# EAGLE board PCB (EAGLE 9.7.0)
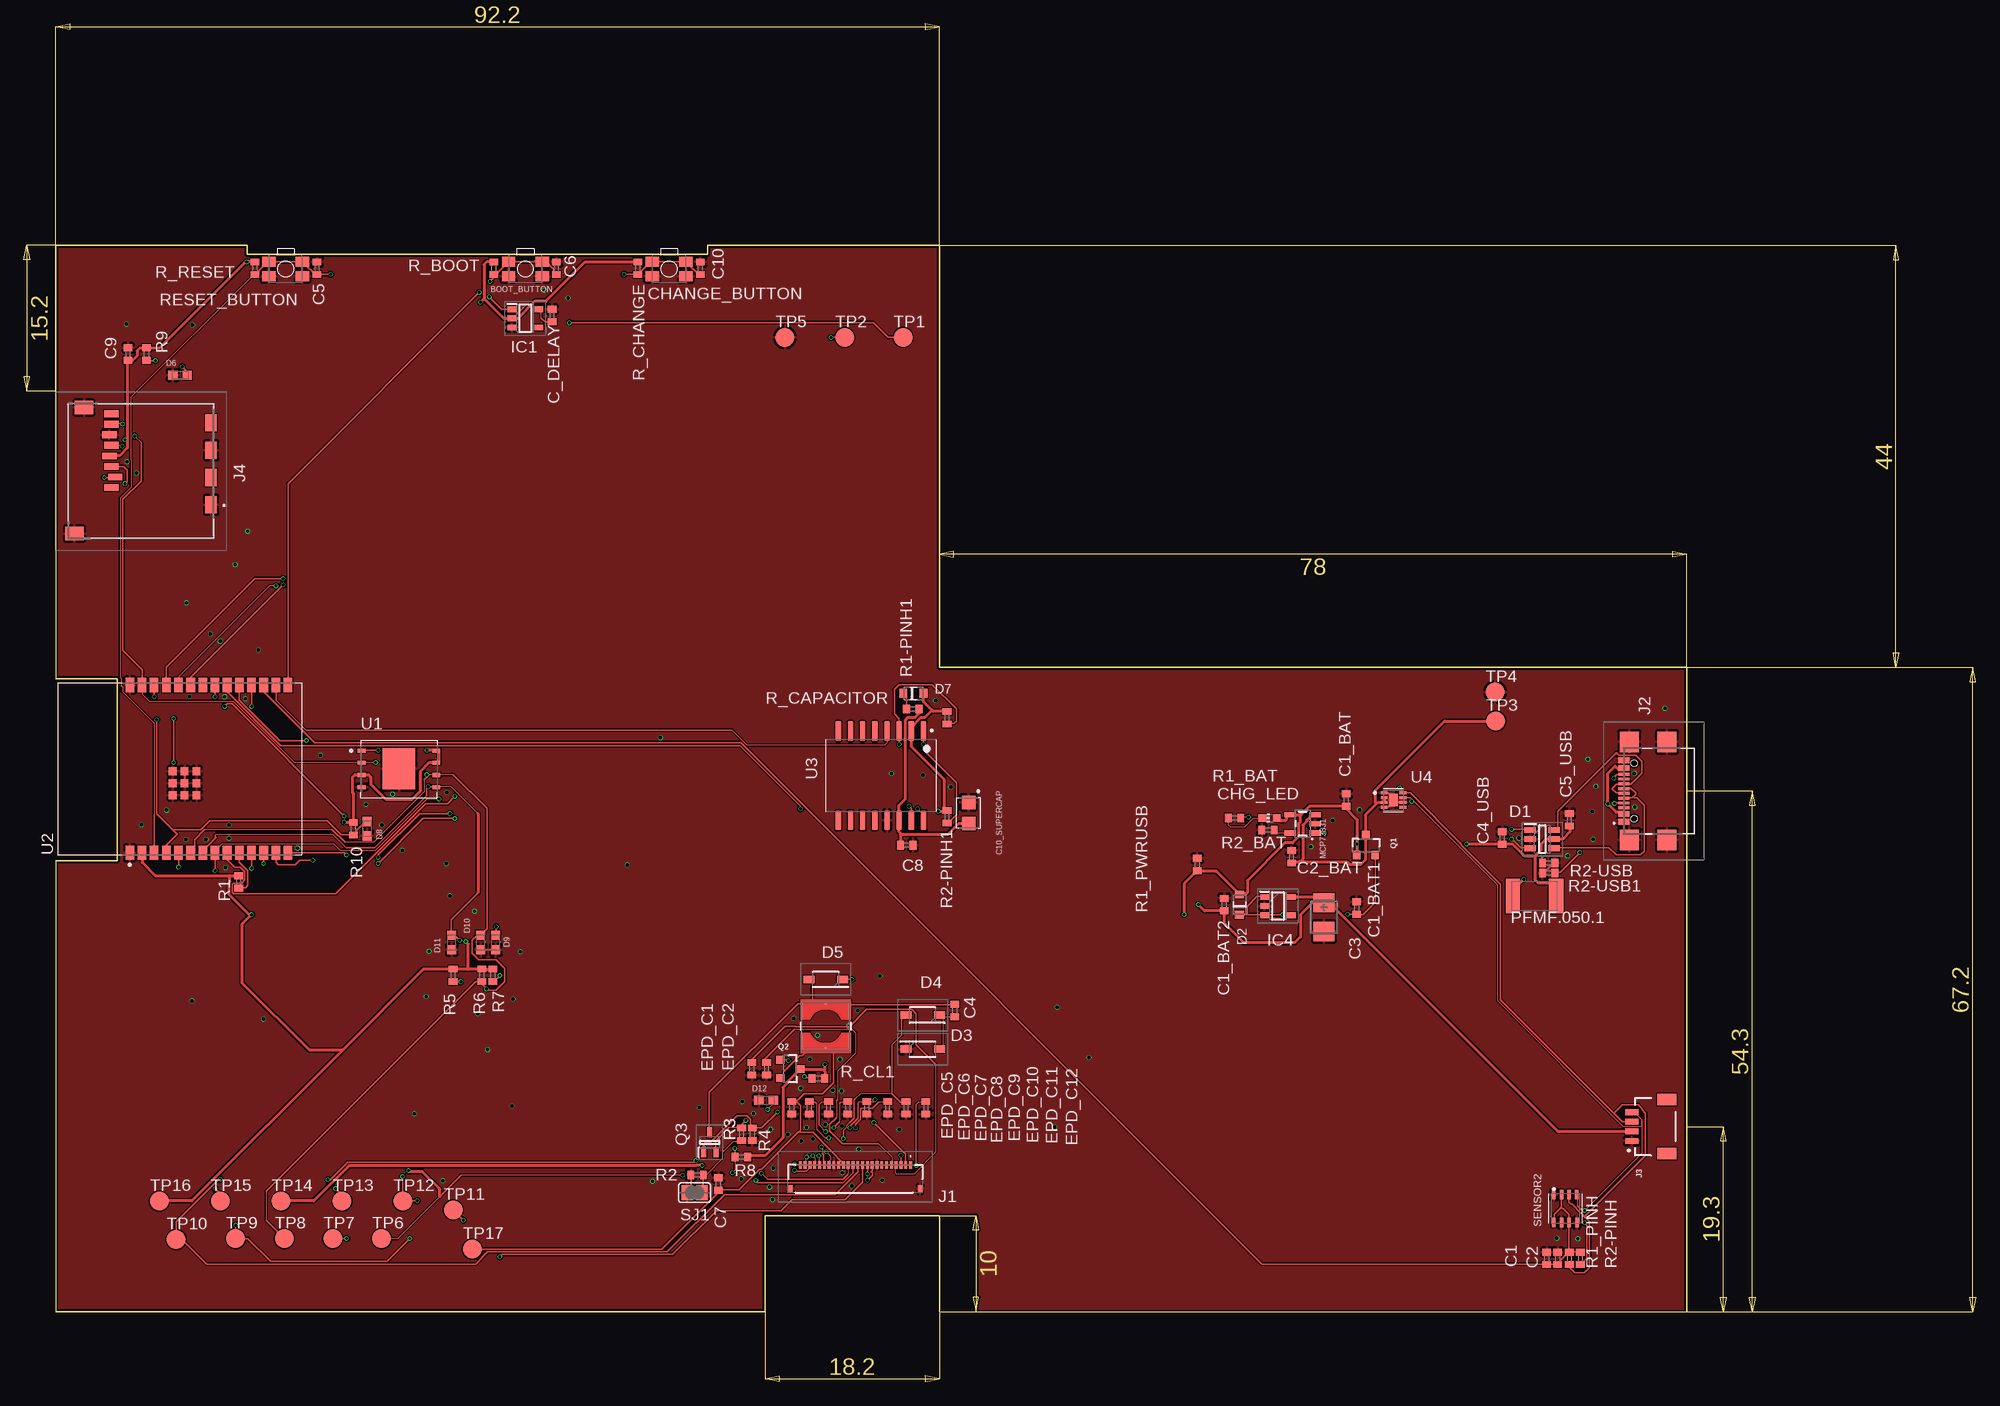
[diagram p0: board, top side]
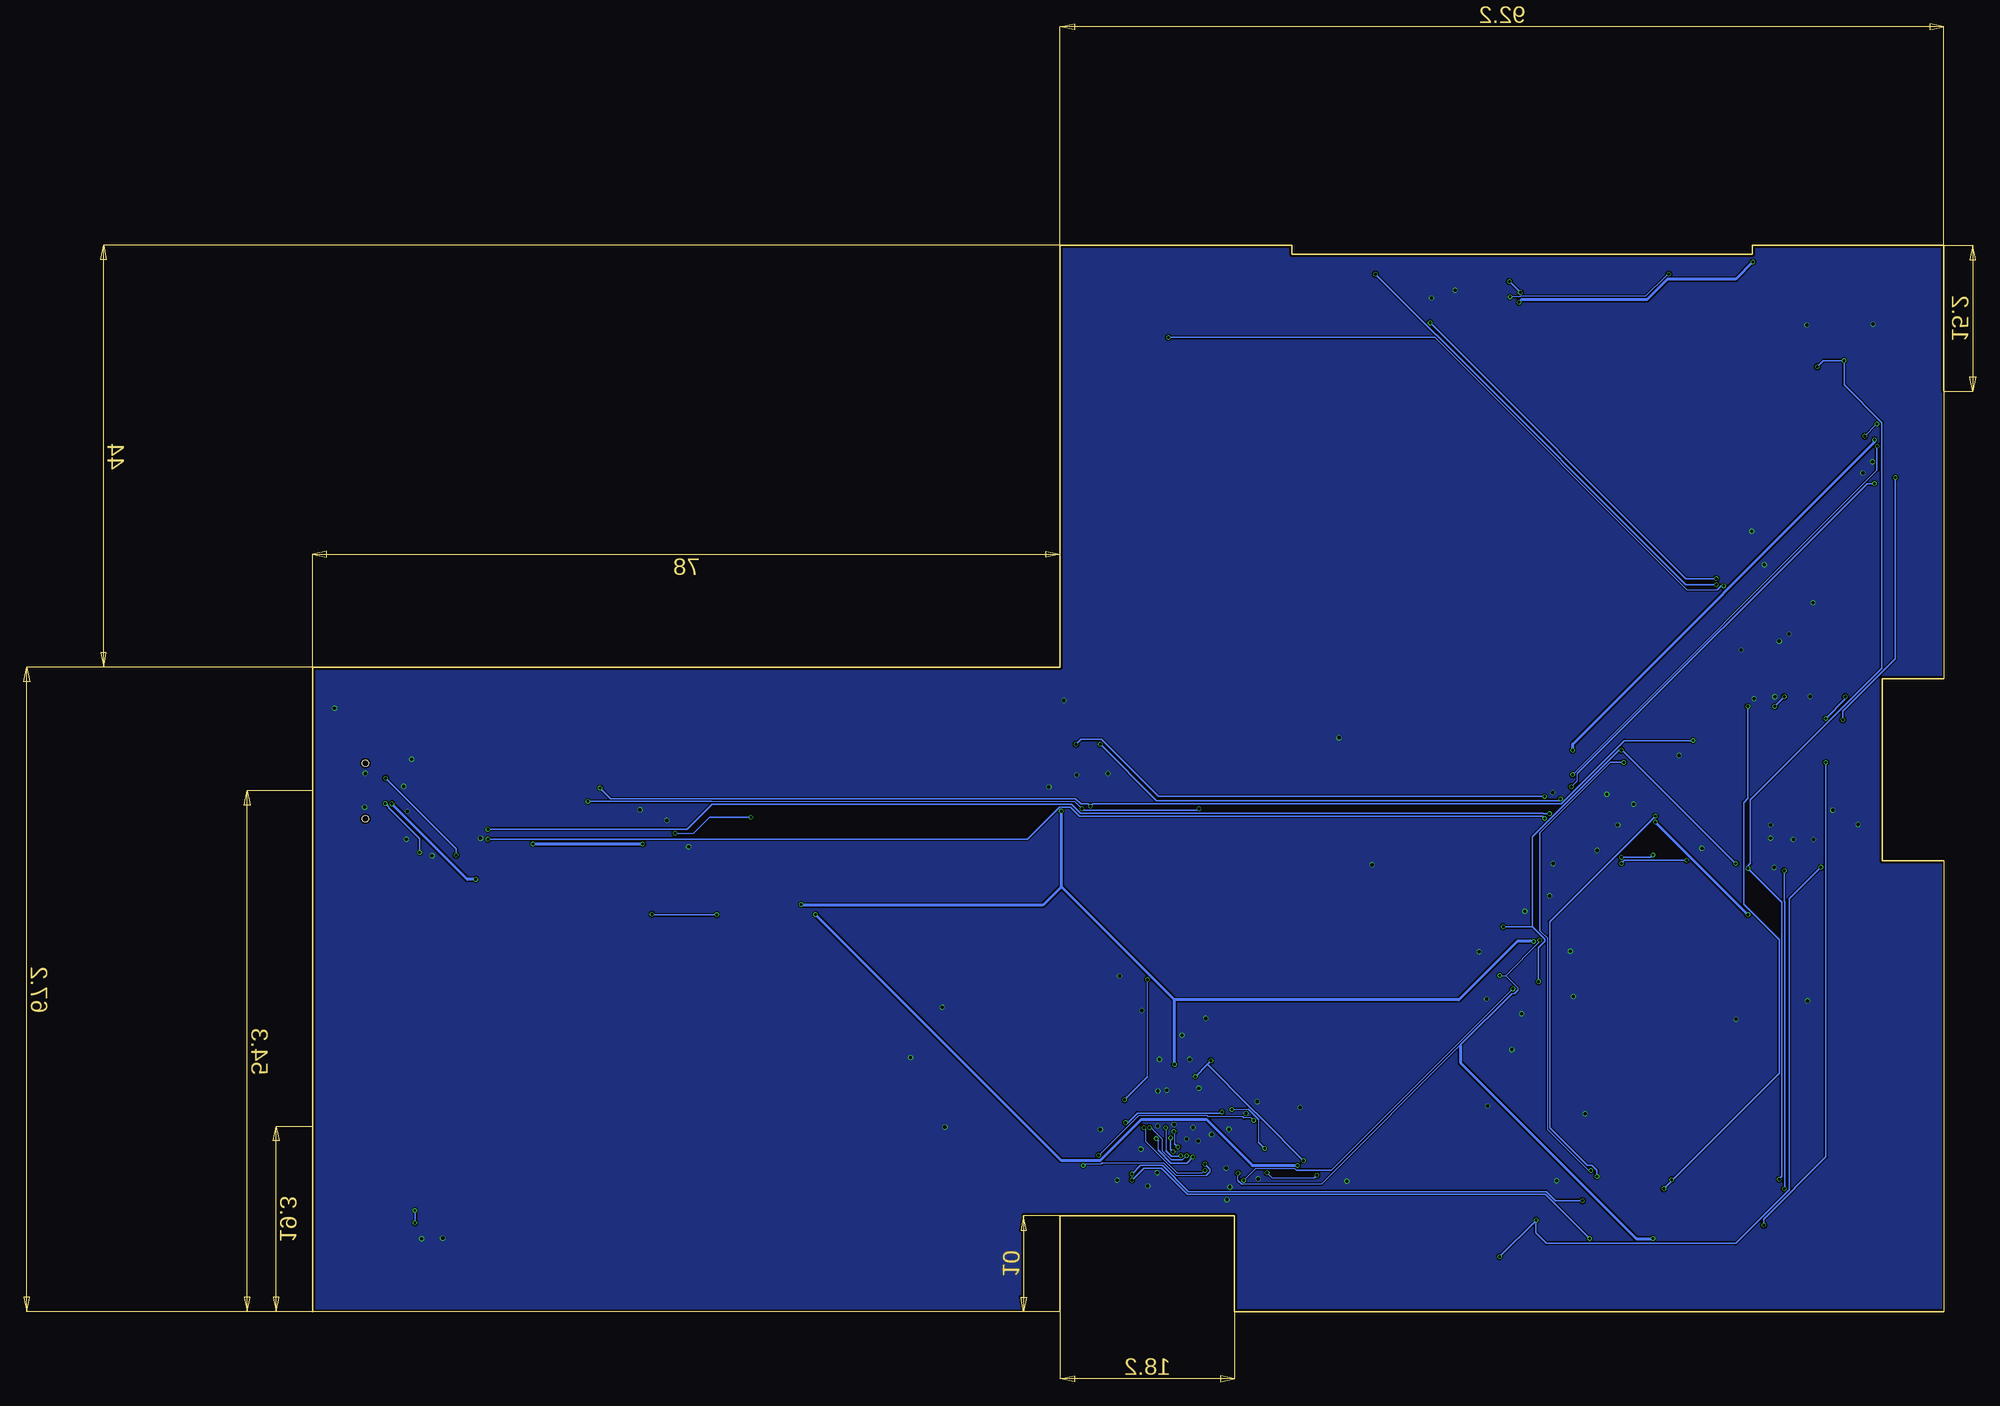
[diagram p1: board, bottom side, seen from below]

Size 170.2 x 111.2 mm. Coordinates in mm from the lower left corner, seen from the top.
Outline: 92.2,0 170.2,0 170.2,67.2 92.2,67.2 92.2,111.2 68,111.2 68,110.3 20,110.3 20,111.2 0,111.2 0,96 0,66 6.41,66 6.41,47 0,47 0,0 74,0 74,10 92.2,10 92.2,0
Copper layers (1*16): Top 0.035mm / dielectric 1.6mm / Bottom 0.035mm
Design rules "jlcpcb-2layers.dru": minimum track width 5mil, minimum drill 0.3mm, track to track 5mil, track to pad 5mil, pad to pad 5mil, via to via 5mil, smd to smd 5mil, copper to edge 0.2mm, drill to drill 6mil, minimum pad ring 10mil, minimum via ring 3mil, stop-mask expansion 4mil, vias tented up to drill 0mil, thermal gap 10mil

## Footprints (pad centres in the part's own frame; a part is rotated, then mirrored left to right if it is on the bottom)
MYBUTTON = smd 1.4 x 1.05: 1 1.75,0.75; 2 -1.75,0.75; 3 -1.75,-0.75; 4 1.75,-0.75
EAGLE-LTSPICE_C0402 = smd 0.7 x 0.9: 1 -0.65,0; 2 0.65,0
RCL_CT3528 = smd 2 x 2.2: + -1.5,0; - 1.5,0
CAPCP3225X100N = smd 1.4 x 1.4: 1 -1.1,0; 2 1.1,0
ADAFRUIT_CHIP-LED0603 = smd 0.8 x 0.8: A 0,-0.75; C 0,0.75
SOT95P280X145-6N = smd 1.2 x 0.6: 1 -1.25,0.95; 2 -1.25,0; 3 -1.25,-0.95; 4 1.25,-0.95; 5 1.25,0; 6 1.25,0.95
ESP32_WROVER_AVX---SD0805S020S1R0_AVX_SD0805S020S1R0_0 = smd 0.8 x 0.9: 1 -1.05,0; 2 1.05,0
SOD3716X135N = smd 1.15 x 0.8: 1 -1.75,0; 2 1.75,0
DIOC1608X36N = smd 0.97 x 0.94: 1 -0.75,0; 2 0.75,0
SOT95P280X125-5N = smd 0.9 x 0.6: 1 -1.4,0.95; 2 -1.4,0; 3 -1.4,-0.95; 4 1.4,-0.95; 5 1.4,0.95
SOT95P280X120-5N = smd 0.9 x 0.6: 1 -1.4,0.95; 2 -1.4,0; 3 -1.4,-0.95; 4 1.4,-0.95; 5 1.4,0.95
FH34SRJ24S05SH99 = smd 0.3 x 0.8: 1 5.75,1.45; 2 5.25,1.45; 3 4.75,1.45; 4 4.25,1.45; 5 3.75,1.45; 6 3.25,1.45; 7 2.75,1.45; 8 2.25,1.45; 9 1.75,1.45; 10 1.25,1.45; 11 0.75,1.45; 12 0.25,1.45; 13 -0.25,1.45; 14 -0.75,1.45; 15 -1.25,1.45; 16 -1.75,1.45; 17 -2.25,1.45; 18 -2.75,1.45; 19 -3.25,1.45; 20 -3.75,1.45; 21 -4.25,1.45; 22 -4.75,1.45; 23 -5.25,1.45; 24 -5.75,1.45 | smd 0.4 x 0.8: MP1 6.75,-1.05; MP2 -6.75,-1.05
SAMACSYS_PARTS_USB4110GFA = smd 0.3 x 1.15: A1 -3.35,3.678; A4 -2.55,3.678; A5 -1.25,3.678; A6 -0.25,3.678; A7 0.25,3.678; A8 1.25,3.678; A9 2.55,3.678; A12 3.35,3.678; B1 3.05,3.678; B4 2.25,3.678; B5 1.75,3.678; B6 0.75,3.678; B7 -0.75,3.678; B8 -1.75,3.678; B9 -2.25,3.678; B12 -3.05,3.678 | smd 2.18 x 2: MP1 -5.11,-0.827; MP2 5.11,-0.827; MP3 -5.11,3.103; MP4 5.11,3.103 | hole 0.65: -2.89,2.603; 2.89,2.603
JST04_1MM_RA = smd 0.6 x 1.35: 1 -1.5,0; 2 -0.5,0; 3 0.5,0; 4 1.5,0 | smd 1.2 x 2: NC1 2.8,-3.675; NC2 -2.8,-3.675
112ATAARR03ATTEND = smd 1.8 x 1.2: G1 10.6,10.4; G2 4.9,10.4; S1 7.75,10.4; S2 2.05,10.4 | smd 1.4 x 1.9: G3 13.6,-3.85; G4 0.45,-2.85 | smd 0.7 x 1.5: P1 8.8,0; P2 7.7,0.4; P3 6.6,0; P4 5.5,-0.2; P5 4.4,0; P6 3.3,-0.2; P7 2.2,0; P8 1.1,0
IND_4828-WE-TPC_WRE = smd 0.127 x 0.127: 1 -2.286,0; 2 2.286,0
ESP32_WROVER_SPARKFUN-IC-POWER_SOT23-5 = smd 0.55 x 1.2: 1 -0.95,-1.3; 2 0,-1.3; 3 0.95,-1.3; 4 0.95,1.3; 5 -0.95,1.3
ESP32C6_VARISTOR_CT/CN1812 = smd 1.5 x 3.6: 1 -2.25,0; 2 2.25,0
ESP32_WROVER_SPARKFUN-DISCRETESEMI_SOT23-3 = smd 0.8 x 0.9: 1 -0.95,-1; 2 0.95,-1; 3 0,1.1
SOT65P210X110-3N = smd 1.05 x 0.5: 1 -1.05,0.65; 2 -1.05,-0.65; 3 1.05,0
ESP32_WROVER_EAGLE-LTSPICE_R0402 = smd 0.7 x 0.9: 1 -0.65,0; 2 0.65,0
ESP32_WROVER_BME680_PSON80P300X300X100-8N = smd 1.016 x 0.5: 1 1.458,1.2; 2 1.458,0.4; 3 1.458,-0.4; 4 1.458,-1.2; 5 -1.458,-1.22; 6 -1.458,-0.4; 7 -1.458,0.4; 8 -1.458,1.2
SJ = smd 1.168 x 1.6: 1 -0.762,0; 2 0.762,0
TP20R = smd 2 x 2: TP 0,0
SON127P600X800X80-9N = smd 0.94 x 0.44: 1 -3.895,1.905; 2 -3.895,0.635; 3 -3.895,-0.635; 4 -3.895,-1.905; 5 3.895,-1.905; 6 3.895,-0.635; 7 3.895,0.635; 8 3.895,1.905 | smd 3.4 x 4.3: 9 0,0
XCVR_ESP32-C6-WROOM-1-N8 = smd 1.5 x 0.9: 1 -8.75,5.26; 2 -8.75,3.99; 3 -8.75,2.72; 4 -8.75,1.45; 5 -8.75,0.18; 6 -8.75,-1.09; 7 -8.75,-2.36; 8 -8.75,-3.63; 9 -8.75,-4.9; 10 -8.75,-6.17; 11 -8.75,-7.44; 12 -8.75,-8.71; 13 -8.75,-9.98; 14 -8.75,-11.25; 15 8.75,-11.25; 16 8.75,-9.98; 17 8.75,-8.71; 18 8.75,-7.44; 19 8.75,-6.17; 20 8.75,-4.9; 21 8.75,-3.63; 22 8.75,-2.36; 23 8.75,-1.09; 24 8.75,0.18; 25 8.75,1.45; 26 8.75,2.72; 27 8.75,3.99; 28 8.75,5.26 | smd 0.8 x 0.8: 29_1 -2.755,0.79; 29_2 -1.505,0.79; 29_3 -0.255,0.79; 29_4 -2.755,-0.46; 29_5 -1.505,-0.46; 29_6 -0.255,-0.46; 29_7 -2.755,-1.71; 29_8 -1.505,-1.71; 29_9 -0.255,-1.71
SOIC127P1032X265-16N = smd 2.05 x 0.59: 1 -4.655,4.445; 2 -4.655,3.175; 3 -4.655,1.905; 4 -4.655,0.635; 5 -4.655,-0.635; 6 -4.655,-1.905; 7 -4.655,-3.175; 8 -4.655,-4.445; 9 4.655,-4.445; 10 4.655,-3.175; 11 4.655,-1.905; 12 4.655,-0.635; 13 4.655,0.635; 14 4.655,1.905; 15 4.655,3.175; 16 4.655,4.445
SON50P200X200X80-9N = smd 0.76 x 0.27: 1 -0.985,0.75; 2 -0.985,0.25; 3 -0.985,-0.25; 4 -0.985,-0.75; 5 0.985,-0.75; 6 0.985,-0.25; 7 0.985,0.25; 8 0.985,0.75 | smd 0.9 x 1.3: 9 0,0

## Placement (x,y rotation side)
BOOT_BUTTON  BUTTON_CUSYOMV1  [MYBUTTON]  49.02,108.75 180 top
C1  100nF  [EAGLE-LTSPICE_C0402]  155.56,5.55 90 top
C1_BAT  4.7uF  [EAGLE-LTSPICE_C0402]  134.64,53.36 90 top
C1_BAT1  4.7uF  [EAGLE-LTSPICE_C0402]  135.72,42.1 90 top
C1_BAT2  4.7uf  [EAGLE-LTSPICE_C0402]  121.92,42.45 90 top
C2  100nF  [EAGLE-LTSPICE_C0402]  156.71,5.55 90 top
C2_BAT  4.7uF  [EAGLE-LTSPICE_C0402]  128.94,47.45 90 top
C3  100uF TANT  [RCL_CT3528]  132.34,41.15 270 top
C4  4.7uF/25V  [EAGLE-LTSPICE_C0402]  93.81,31.41 90 top
C4_USB  100nF  [EAGLE-LTSPICE_C0402]  150.92,49.4 90 top
C5  1uF  [EAGLE-LTSPICE_C0402]  27.28,108.83 90 top
C5_USB  4.7uF  [EAGLE-LTSPICE_C0402]  157.92,51.31 90 top
C6  100nF  [EAGLE-LTSPICE_C0402]  52.26,108.83 90 top
C7  10uF  [EAGLE-LTSPICE_C0402]  69.14,13.3 90 top
C8  100nF  [EAGLE-LTSPICE_C0402]  88.8,48.64 0 top
C9  100nF  [EAGLE-LTSPICE_C0402]  7.56,99.87 90 top
C10  100nF  [EAGLE-LTSPICE_C0402]  67.26,108.83 90 top
C10_SUPERCAP  CPH3225A  [CAPCP3225X100N]  95.25,52.01 270 top
C_DELAY  100nF  [EAGLE-LTSPICE_C0402]  51.8,103.9 90 top
CHANGE_BUTTON  BUTTON_CUSYOMV1  [MYBUTTON]  64,108.75 180 top
CHG_LED  [ADAFRUIT_CHIP-LED0603]  126.65,51.48 90 top
D1  USBLC6-2SC6Y  [SOT95P280X145-6N]  155.1,49.28 0 top
D2  SD0805S020S1R0  [ESP32_WROVER_AVX---SD0805S020S1R0_AVX_SD0805S020S1R0_0]  123.51,42.45 90 top
D3  MBR0530  [SOD3716X135N]  90.45,27.38 0 top
D4  MBR0530  [SOD3716X135N]  90.45,30.92 180 top
D5  MBR0530  [SOD3716X135N]  80.35,34.64 180 top
D6  PGB1010603MR  [DIOC1608X36N]  12.98,97.68 0 top
D7  ESP32_WROVER_AVX---SD0805S020S1R0_AVX_SD0805S020S1R0_0_0AVX_SD0805S020S1R0_0_0  [ESP32_WROVER_AVX---SD0805S020S1R0_AVX_SD0805S020S1R0_0]  89.5,64.49 0 top
D8  PGB1010603MR  [DIOC1608X36N]  32.52,50.36 90 top
D9  PGB1010603MR  [DIOC1608X36N]  45.92,38.5 90 top
D10  PGB1010603MR  [DIOC1608X36N]  44.32,38.5 90 top
D11  PGB1010603MR  [DIOC1608X36N]  41.32,38.5 90 top
D12  PGB1010603MR  [DIOC1608X36N]  74.12,22.02 0 top
EPD_C1  1uF/50V  [EAGLE-LTSPICE_C0402]  72.64,25.32 90 top
EPD_C2  1uF/50V  [EAGLE-LTSPICE_C0402]  74.18,25.32 90 top
EPD_C5  0.1uF/50V  [EAGLE-LTSPICE_C0402]  76.8,21.25 90 top
EPD_C6  1uF/50V  [EAGLE-LTSPICE_C0402]  78.64,21.25 90 top
EPD_C7  1uF/50V  [EAGLE-LTSPICE_C0402]  80.64,21.25 90 top
EPD_C8  1uF/50V  [EAGLE-LTSPICE_C0402]  82.64,21.25 90 top
EPD_C9  1uF/50V  [EAGLE-LTSPICE_C0402]  84.64,21.25 90 top
EPD_C10  1uF/50V  [EAGLE-LTSPICE_C0402]  86.8,21.25 90 top
EPD_C11  1uF/50V  [EAGLE-LTSPICE_C0402]  88.72,21.25 90 top
EPD_C12  1uF/50V  [EAGLE-LTSPICE_C0402]  90.8,21.25 90 top
IC1  BD5229G-TR  [SOT95P280X125-5N]  49,103.6 0 top
IC4  XC6220A331MR-G  [SOT95P280X120-5N]  127.53,42.3 0 top
J1  FH34SRJ-24S-0.5SH_99_  [FH34SRJ24S05SH99]  83.44,13.85 0 top
J2  SAMACSYS_PARTS_USB4110-GF-A  [SAMACSYS_PARTS_USB4110GFA]  167.28,54.3 90 top
J3  QWIIC_RIGHT_ANGLE  [JST04_1MM_RA]  164.43,19.3 90 top
J4  112A-TAAR-R03_ATTEND  [112ATAARR03ATTEND]  5.82,94.75 270 top
L1  744043680IND_4828-WE-TPC_WRE  [IND_4828-WE-TPC_WRE]  80.35,29.77 270 top
MCP73831  ESP32_WROVER_SPARKFUN-IC-POWER_MCP73831  [ESP32_WROVER_SPARKFUN-IC-POWER_SOT23-5]  130.1,50.88 90 top
PFMF.050.1  ESP32C6_VARISTORCN1812  [ESP32C6_VARISTOR_CT/CN1812]  154.28,43.34 0 top
Q1  20V/4.2A/52mΩ/1.4W  [ESP32_WROVER_SPARKFUN-DISCRETESEMI_SOT23-3]  136.7,48.61 0 top
Q2  20V/4.2A/52mΩ/1.4W  [ESP32_WROVER_SPARKFUN-DISCRETESEMI_SOT23-3]  76.61,25.32 270 top
Q3  SI1308EDL-T1-GE3  [SOT65P210X110-3N]  68.24,17.65 90 top
R1  [ESP32_WROVER_EAGLE-LTSPICE_R0402]  19.1,44.8 90 top
R1-PINH1  10K  [ESP32_WROVER_EAGLE-LTSPICE_R0402]  93,61.93 90 top
R1_BAT  200  [ESP32_WROVER_EAGLE-LTSPICE_R0402]  123,51.48 0 top
R1_PINH  10K  [ESP32_WROVER_EAGLE-LTSPICE_R0402]  157.92,5.55 90 top
R1_PWRUSB  100K  [ESP32_WROVER_EAGLE-LTSPICE_R0402]  119.09,46.63 270 top
R2  2.2  [ESP32_WROVER_EAGLE-LTSPICE_R0402]  66.93,14.26 0 top
R2-PINH  10K  [ESP32_WROVER_EAGLE-LTSPICE_R0402]  159.07,5.55 90 top
R2-PINH1  10K  [ESP32_WROVER_EAGLE-LTSPICE_R0402]  93,51.6 90 top
R2-USB  5k1  [ESP32_WROVER_EAGLE-LTSPICE_R0402]  155.77,46.79 0 top
R2-USB1  5k1  [ESP32_WROVER_EAGLE-LTSPICE_R0402]  155.77,45.74 0 top
R2_BAT  2K  [ESP32_WROVER_EAGLE-LTSPICE_R0402]  126.48,50.24 0 top
R3  0.47  [ESP32_WROVER_EAGLE-LTSPICE_R0402]  71.56,18.49 90 top
R4  10K  [ESP32_WROVER_EAGLE-LTSPICE_R0402]  72.68,18.49 90 top
R5  10K  [ESP32_WROVER_EAGLE-LTSPICE_R0402]  41.48,35.09 90 top
R6  10K  [ESP32_WROVER_EAGLE-LTSPICE_R0402]  44.48,35.09 90 top
R7  10K  [ESP32_WROVER_EAGLE-LTSPICE_R0402]  45.63,35.09 90 top
R8  10K  [ESP32_WROVER_EAGLE-LTSPICE_R0402]  71.54,16.14 0 top
R9  10K  [ESP32_WROVER_EAGLE-LTSPICE_R0402]  9.48,99.87 90 top
R10  10K  [ESP32_WROVER_EAGLE-LTSPICE_R0402]  31.08,50.36 90 top
R_BOOT  10K  [ESP32_WROVER_EAGLE-LTSPICE_R0402]  45.72,108.83 90 top
R_CAPACITOR  15  [ESP32_WROVER_EAGLE-LTSPICE_R0402]  89.42,62.85 0 top
R_CHANGE  10K  [ESP32_WROVER_EAGLE-LTSPICE_R0402]  60.75,108.83 90 top
R_CL1  10K  [ESP32_WROVER_EAGLE-LTSPICE_R0402]  79.57,24.32 0 top
R_RESET  10K  [ESP32_WROVER_EAGLE-LTSPICE_R0402]  20.8,108.83 90 top
RESET_BUTTON  BUTTON_CUSYOMV1  [MYBUTTON]  24,108.75 180 top
SENSOR2  ESP32_WROVER_BME680_BME680  [ESP32_WROVER_BME680_PSON80P300X300X100-8N]  157.5,10.74 90 top
SJ1  [SJ]  66.66,12.4 0 top
TP1  TPTP20R  [TP20R]  88.41,101.6 0 top
TP2  TPTP20R  [TP20R]  82.33,101.6 0 top
TP3  TPTP20R  [TP20R]  150.25,61.6 0 top
TP4  TPTP20R  [TP20R]  150.17,64.6 0 top
TP5  TPTP20R  [TP20R]  76.09,101.6 0 top
TP6  TPTP20R  [TP20R]  34.01,7.6 0 top
TP7  TPTP20R  [TP20R]  28.93,7.6 0 top
TP8  TPTP20R  [TP20R]  23.85,7.6 0 top
TP9  TPTP20R  [TP20R]  18.77,7.6 0 top
TP10  TPTP20R  [TP20R]  12.58,7.52 0 top
TP11  TPTP20R  [TP20R]  41.49,10.6 0 top
TP12  TPTP20R  [TP20R]  36.23,11.52 0 top
TP13  TPTP20R  [TP20R]  29.88,11.52 0 top
TP14  TPTP20R  [TP20R]  23.53,11.52 0 top
TP15  TPTP20R  [TP20R]  17.18,11.52 0 top
TP16  TPTP20R  [TP20R]  10.83,11.52 0 top
TP17  TPTP20R  [TP20R]  43.48,6.52 0 top
U1  W25Q512JVEIQ  [SON127P600X800X80-9N]  35.83,56.61 0 top
U2  ESP32-C6-WROOM-1-N8  [XCVR_ESP32-C6-WROOM-1-N8]  13,56.61 90 top
U3  DS3231SN#  [SOIC127P1032X265-16N]  86.1,55.91 270 top
U4  MAX17048G+T10  [SON50P200X200X80-9N]  139.57,53.36 0 top

## Library data of the parts
BOOT_BUTTON CHANGE_BUTTON CHG_LED PFMF.050.1 RESET_BUTTON SJ1 TP1-TP17 = DeskAssistant v19 v1
C1 C1_BAT C1_BAT1 C1_BAT2 C2 C2_BAT C4 C4_USB C5 C5_USB C6-C10 C_DELAY EPD_C1 EPD_C2 EPD_C5-EPD_C12 = DeskAssistant v19 v1; SPICEMODEL: NONE; SPICEPREFIX: C
C3 = DeskAssistant v19 v1; SPICEPREFIX: C
C10_SUPERCAP = DeskAssistant v19 v1; AVAILABILITY: Not in stock; CHECK_PRICES: https://www.snapeda.com/parts/CPH3225A/Seiko+Instruments/view-part/?ref=eda; DESCRIPTION: 11 mF (EDLC) Supercapacitor 3.3 V 1210 (3225 Metric) - -; MF: Seiko Instruments; MP: CPH3225A; PACKAGE: 1210 Seiko; PRICE: None; PURCHASE-URL: https://www.snapeda.com/api/url_track_click_mouser/?unipart_id=562593&manufacturer=Seiko Instruments&part_name=CPH3225A&search_term=None; SNAPEDA_LINK: https://www.snapeda.com/parts/CPH3225A/Seiko+Instruments/view-part/?ref=snap
D1 = DeskAssistant v19 v1; AVAILABILITY: In Stock; CHECK_PRICES: https://www.snapeda.com/parts/USBLC6-2SC6Y/STMicroelectronics/view-part/?ref=eda; DESCRIPTION: 17V Clamp 5A (8/20µs) Ipp Tvs Diode Surface Mount SOT-23-6; MF: STMicroelectronics; MP: USBLC6-2SC6Y; PACKAGE: SOT-23-6 STMicroelectronics; PRICE: None; SNAPEDA_LINK: https://www.snapeda.com/parts/USBLC6-2SC6Y/STMicroelectronics/view-part/?ref=snap
D2 = DeskAssistant v19 v1; CENTROID_NOT_SPECIFIED: No; DATASHEET: http://datasheets.avx.com/schottky.pdf; DIGIKEY_DESCRIPTION: DIODE SCHOTTKY 20V 1A 0805; DIGIKEY_PART_NUMBER: 478-7800-1-ND; LEAD_FREE: yes; MF: AVX; MOUSER_PART_NUMBER: 581-SD0805S020S1R0; PACKAGE: 0805 (2012 metric); PREFIX: D; ROHS: yes; SD0805S020S1R0: SD0805S020S1R0; TEMPERATURE_RANGE_HIGH: +125°C; TEMPERATURE_RANGE_LOW: -55°C
D3-D5 = DeskAssistant v19 v1; AVAILABILITY: In Stock; CHECK_PRICES: https://www.snapeda.com/parts/MBR0530/Onsemi/view-part/?ref=eda; DESCRIPTION: Diode Schottky 30 V 500mA Surface Mount SOD-123; MF: ON Semiconductor; MP: MBR0530; PACKAGE: SOD-123-2 ON Semiconductor; PRICE: None; PURCHASE-URL: https://www.snapeda.com/api/url_track_click_mouser/?unipart_id=179458&manufacturer=ON Semiconductor&part_name=MBR0530&search_term=None; SNAPEDA_LINK: https://www.snapeda.com/parts/MBR0530/Onsemi/view-part/?ref=snap
D6 D8-D12 = DeskAssistant v19 v1; AVAILABILITY: In Stock; CHECK_PRICES: https://www.snapeda.com/parts/PGB1010603MR/Littelfuse/view-part/?ref=eda; DESCRIPTION: 150V (Typ) Clamp - Ipp Tvs Diode Surface Mount 0603 (1608 Metric); MF: Littelfuse Inc.; MP: PGB1010603MR; PACKAGE: 0603 Littelfuse Inc.; PRICE: None; PURCHASE-URL: https://www.snapeda.com/api/url_track_click_mouser/?unipart_id=5659453&manufacturer=Littelfuse Inc.&part_name=PGB1010603MR&search_term=None; SNAPEDA_LINK: https://www.snapeda.com/parts/PGB1010603MR/Littelfuse/view-part/?ref=snap
D7 = DeskAssistant v19 v1; CENTROID_NOT_SPECIFIED: No; DATASHEET: http://datasheets.avx.com/schottky.pdf; DIGIKEY_DESCRIPTION: DIODE SCHOTTKY 20V 1A 0805; DIGIKEY_PART_NUMBER: 478-7800-1-ND; LEAD_FREE: yes; MF: AVX; MOUSER_PART_NUMBER: 581-SD0805S020S1R0; PACKAGE: 0805 (2012 metric); PREFIX: D; ROHS: yes; TEMPERATURE_RANGE_HIGH: +125°C; TEMPERATURE_RANGE_LOW: -55°C
IC1 = DeskAssistant v19 v1; DESCRIPTION: Voltage Detector with Adjustable Delay Time: CMOS processes are utilized to develop high precision, low current consumption CMOS reset ICs that allow arbitrary setting of the delay time. The extensive lineup includes both Nch Open Drain and CMOS output types in a wide range of detection voltages (from 2.3V to 6.0V, in 0.1V steps), enabling selection of the ideal solution based on customer requirements. In addition, the entire series is of course both lead-free and RoHS-compliant.; HEIGHT: 1.25mm; MANUFACTURER_NAME: ROHM Semiconductor; MANUFACTURER_PART_NUMBER: BD5229G-TR; MOUSER_PART_NUMBER: 755-BD5229G-TR; MOUSER_PRICE-STOCK: https://www.mouser.co.uk/ProductDetail/ROHM-Semiconductor/BD5229G-TR?qs=4kLU8WoGk0vvnhrrYwdszw%3D%3D
IC4 = DeskAssistant v19 v1; DESCRIPTION: LDO Voltage Regulators; HEIGHT: 1.2mm; MANUFACTURER_NAME: Torex; MANUFACTURER_PART_NUMBER: XC6220A331MR-G; MOUSER_PART_NUMBER: 865-XC6220A331MR-G; MOUSER_PRICE-STOCK: https://www.mouser.co.uk/ProductDetail/Torex-Semiconductor/XC6220A331MR-G?qs=AsjdqWjXhJ8ZSWznL1J0gg%3D%3D
J1 = DeskAssistant v19 v1; DESCRIPTION: 24 Position FFC, FPC Connector Contacts, Top and Bottom 0.020" (0.50mm) Surface Mount, Right Angle; HEIGHT: 1.1mm; MANUFACTURER_NAME: Hirose; MANUFACTURER_PART_NUMBER: FH34SRJ-24S-0.5SH(99); MOUSER_PART_NUMBER: 798-FH34SRJ24S05SH99; MOUSER_PRICE-STOCK: https://www.mouser.co.uk/ProductDetail/Hirose-Connector/FH34SRJ-24S-0.5SH99?qs=vcbW%252B4%252BSTIpKBl5ap9J8Fw%3D%3D
J2 = DeskAssistant v19 v1; DESCRIPTION: CONN USB 2.0 TYPE-C R/A SMT; HEIGHT: 3.26mm; MANUFACTURER_NAME: GCT (GLOBAL CONNECTOR TECHNOLOGY); MANUFACTURER_PART_NUMBER: USB4110-GF-A; MOUSER_PART_NUMBER: 640-USB4110-GF-A; MOUSER_PRICE-STOCK: https://www.mouser.co.uk/ProductDetail/GCT/USB4110-GF-A?qs=KUoIvG%2F9IlYiZvIXQjyJeA%3D%3D
J3 = DeskAssistant v19 v1; PROD_ID: CONN-13694
J4 = DeskAssistant v19 v1; DESCRIPTION: Micro SD Card Socket, Push-Push Type, Top Mount, SMT, H=1.83mm, 10u; HEIGHT: 1.9mm; MANUFACTURER_NAME: ATTEND; MANUFACTURER_PART_NUMBER: 112A-TAAR-R03 ATTEND
L1 = DeskAssistant v19 v1; 68UH: 68UH; COPYRIGHT: Copyright (C) 2024 Ultra Librarian. All rights reserved.; MANUFACTURER_PART_NUMBER: 744043680; MFR_NAME: Wurth Electronics
MCP73831 = DeskAssistant v19 v1; PROD_ID: IC-09995
Q1 Q2 = DeskAssistant v19 v1; DMG2305UX-7: DMG2305UX-7; PROD_ID: TRAN-14388
Q3 = DeskAssistant v19 v1; AVAILABILITY: In Stock; CHECK_PRICES: https://www.snapeda.com/parts/SI1308EDL-T1-GE3/Vishay+Siliconix/view-part/?ref=eda; DESCRIPTION: Si1308EDL-T1-GE3 N-channel MOSFET Transistor, 1.5 A, 30 V, 3-Pin SC-70 | Siliconix / Vishay SI1308EDL-T1-GE3; MF: Vishay Siliconix; MP: SI1308EDL-T1-GE3; PACKAGE: SOT-323 Vishay Semiconductor; PRICE: None; PURCHASE-URL: https://www.snapeda.com/api/url_track_click_mouser/?unipart_id=274603&manufacturer=Vishay Siliconix&part_name=SI1308EDL-T1-GE3&search_term=None; SNAPEDA_LINK: https://www.snapeda.com/parts/SI1308EDL-T1-GE3/Vishay+Siliconix/view-part/?ref=snap
R1 R1-PINH1 R1_BAT R1_PINH R2 R2-PINH R2-PINH1 R2-USB R2-USB1 R2_BAT R3-R10 R_BOOT R_CAPACITOR R_CHANGE R_CL1 R_RESET = DeskAssistant v19 v1; SPICEMODEL: NONE; SPICEPREFIX: R
R1_PWRUSB = DeskAssistant v19 v1; PWRUSB: PWRUSB; SPICEMODEL: NONE; SPICEPREFIX: R
SENSOR2 = DeskAssistant v19 v1; AVAILABILITY: Unavailable; BME688: BME688; DESCRIPTION: Integrated Environmental Unit; MF: Bosch Sensortec; MP: BME680; PACKAGE: LGA-8 Bosch Tools; PRICE: None
U1 = DeskAssistant v19 v1; AVAILABILITY: In Stock; CHECK_PRICES: https://www.snapeda.com/parts/W25Q512JVEIQ/Winbond+Electronics/view-part/?ref=eda; DESCRIPTION: FLASH - NOR Memory IC 512Mb (64M x 8) SPI - Quad I/O 133 MHz 8-WSON (8x6); MF: Winbond Electronics; MP: W25Q512JVEIQ; PACKAGE: Package; PRICE: None; SNAPEDA_LINK: https://www.snapeda.com/parts/W25Q512JVEIQ/Winbond+Electronics/view-part/?ref=snap
U2 = DeskAssistant v19 v1; AVAILABILITY: In Stock; CHECK_PRICES: https://www.snapeda.com/parts/ESP32-C6-WROOM-1-N8/Espressif+Systems/view-part/?ref=eda; DESCRIPTION: Multiprotocol Modules ESP32-C6 module, Wi-Fi 6 in 2.4 GHz band, Bluetooth 5, Zigbee 3.0 and Thread. ESP34-WROOM Compatible - ENGINEERING SAMPLE; MF: Espressif Systems; MP: ESP32-C6-WROOM-1-N8; PACKAGE: None; PRICE: None; SNAPEDA_LINK: https://www.snapeda.com/parts/ESP32-C6-WROOM-1-N8/Espressif+Systems/view-part/?ref=snap
U3 = DeskAssistant v19 v1; AVAILABILITY: In Stock; CHECK_PRICES: https://www.snapeda.com/parts/DS3231SN%23/Analog+Devices/view-part/?ref=eda; DESCRIPTION: Extremely Accurate I²C-Integrated RTC/TCXO/Crystal; MF: Analog Devices; MP: DS3231SN#; PACKAGE: SOIC-16 Maxim; PRICE: None; PURCHASE-URL: https://www.snapeda.com/api/url_track_click_mouser/?unipart_id=99048&manufacturer=Analog Devices&part_name=DS3231SN#&search_term=None; SNAPEDA_LINK: https://www.snapeda.com/parts/DS3231SN%23/Analog+Devices/view-part/?ref=snap
U4 = DeskAssistant v19 v1; AVAILABILITY: In Stock; CHECK_PRICES: https://www.snapeda.com/parts/MAX17048G+T10/Analog+Devices/view-part/?ref=eda; DESCRIPTION: 3µA 1-Cell/2-Cell Fuel Gauge with ModelGauge; MF: Analog Devices; MP: MAX17048G+T10; PACKAGE: TDFN-8 Maxim; PRICE: None; PURCHASE-URL: https://www.snapeda.com/api/url_track_click_mouser/?unipart_id=329239&manufacturer=Analog Devices&part_name=MAX17048G+T10&search_term=None; SNAPEDA_LINK: https://www.snapeda.com/parts/MAX17048G+T10/Analog+Devices/view-part/?ref=snap

## Nets
3V3: C1_BAT2.1 C3.+ C9.1 D7.2 IC1.2 IC4.5 J3.2 J4.P4 Q2.3 R1-PINH1.2 R1.2 R2-PINH1.2 R5.2 R6.2 R7.2 R8.2 R9.2 R10.2 R_BOOT.2 R_CHANGE.2 R_CL1.2 R_RESET.2 TP16.TP U1.3 U1.7 U1.8 U2.2 U3.2
32KHZ: R2-PINH1.1 U2.9 U3.1
DN: D1.4 J2.A7 J2.B7
DP: D1.6 J2.A6 J2.B6
EPD_3V3: C7.1 EPD_C5.2 J1.15 J1.16 L1.2 Q2.2 TP17.TP
EPD_3V3_C: Q2.1 R_CL1.1 TP13.TP U2.18
EPD_BUSY: J1.9 TP9.TP U2.26
EPD_CS: D6.2 J1.12 R9.1 TP10.TP U2.11
EPD_DC: J1.11 TP11.TP U2.5
EPD_RST: J1.10 TP12.TP U2.21
FLASH_CS: D9.2 R5.1 U1.1 U2.12
GDR: J1.2 Q3.1 R4.2
GND: BOOT_BUTTON.1 BOOT_BUTTON.2 C1.2 C1_BAT1.2 C1_BAT2.2 C1_BAT.2 C2.2 C2_BAT.2 C3.- C4_USB.2 C5.2 C5_USB.2 C6.2 C7.2 C8.2 C9.2 C10.2 C10_SUPERCAP.1 C_DELAY.2 CHANGE_BUTTON.1 CHANGE_BUTTON.2 D1.2 D3.1 D6.1 D8.1 D9.1 D10.1 D11.1 D12.1 EPD_C1.1 EPD_C2.1 EPD_C5.1 EPD_C6.1 EPD_C7.1 EPD_C8.1 EPD_C9.1 EPD_C10.1 EPD_C11.1 EPD_C12.1 IC1.3 IC4.2 J1.8 J1.17 J1.MP1 J1.MP2 J2.A1 J2.A12 J2.B1 J2.B12 J2.MP1 J2.MP2 J2.MP3 J2.MP4 J3.1 J4.G1 J4.G2 J4.G3 J4.G4 J4.P6 MCP73831.2 R1_PWRUSB.1 R2-USB1.1 R2-USB.2 R2.1 R2_BAT.1 R4.1 RESET_BUTTON.1 RESET_BUTTON.2 SENSOR2.1 SENSOR2.5 SENSOR2.7 SJ1.1 TP4.TP TP5.TP U1.4 U1.9 U2.1 U2.28 U2.29_1 U2.29_2 U2.29_3 U2.29_4 U2.29_5 U2.29_6 U2.29_7 U2.29_8 U2.29_9 U3.13 U4.1 U4.4 U4.6 U4.9
GPIO8: R1.1 U2.10
I2C_PW: C1.1 C2.1 R1_PINH.2 R2-PINH.2 SENSOR2.2 SENSOR2.6 SENSOR2.8 U2.17
INT_RTC: R1-PINH1.1 TP15.TP U2.8 U3.3
IO/BOOT: BOOT_BUTTON.3 BOOT_BUTTON.4 C6.1 R_BOOT.1 U2.15
IO/CHANGE: C10.1 CHANGE_BUTTON.3 CHANGE_BUTTON.4 R_CHANGE.1 U2.23
MISO: D12.2 J4.P7 R8.1 TP6.TP U1.2 U2.27
MOSI: D11.2 J1.14 J4.P3 R7.1 TP7.TP U1.5 U2.7
N$1: J2.B5 R2-USB.1
N$2: C1_BAT1.1 D2.1 IC4.1 IC4.3 Q1.2
N$3: CHG_LED.C R1_BAT.1
N$4: MCP73831.5 R2_BAT.2
N$5: C4.1 D3.2 D4.1
N$6: J2.A5 R2-USB1.2
N$7: EPD_C1.2 J1.4
N$8: MCP73831.1 R1_BAT.2
N$9: EPD_C2.2 J1.5
N$10: C_DELAY.1 IC1.5
N$14: D7.1 R_CAPACITOR.1
N$19: EPD_C12.2 J1.24
N$21: EPD_C10.2 J1.22
N$23: EPD_C8.2 J1.20
N$24: EPD_C7.2 J1.19
N$25: EPD_C6.2 J1.18
PREVGH: D5.1 EPD_C9.2 J1.21
PREVGL: D4.2 EPD_C11.2 J1.23
RESE: J1.3 Q3.2 R3.2
RESE': R2.2 R3.1 SJ1.2
RESET: C5.1 IC1.1 R_RESET.1 RESET_BUTTON.3 RESET_BUTTON.4 U2.3
RTC_RST: U2.16 U3.4
RX: TP2.TP U2.24
SCK: D10.2 J1.13 J4.P5 R6.1 TP8.TP U1.6 U2.6
SCL: J3.4 R2-PINH.1 SENSOR2.4 U2.20 U3.16 U4.7
SDA: J3.3 R1_PINH.1 SENSOR2.3 U2.19 U3.15 U4.8
SRC: C4.2 D5.2 L1.1 Q3.3
SS_SD: D8.2 J4.P2 R10.1 U2.4
TX: TP1.TP U2.25
USB_D+: D1.1 U2.14
USB_D-: D1.3 U2.13
VBAT: C2_BAT.1 MCP73831.3 Q1.3 TP3.TP U4.2 U4.3
VBUS: C1_BAT.1 C4_USB.1 C5_USB.1 CHG_LED.A D1.5 D2.2 MCP73831.4 PFMF.050.1.2 Q1.1 R1_PWRUSB.2 TP14.TP
VRTC: C8.1 C10_SUPERCAP.2 R_CAPACITOR.2 U3.14
VUSB: J2.A4 J2.A9 J2.B4 J2.B9 PFMF.050.1.1

## Tracks (layer width: path | path; a pad name or v marks a point on that pad's centre or on a via)
3V3  (via drill 0.3)
  Top 0.305: J3.2 164.34,18.8 156.72,18.8 133.35,42.16 133.35,42.55 133.22,42.67 132.46,42.67 C3.+ | 132.22,42.67 132.33,42.67 C3.+ | 132.22,42.67 131.06,42.67 | 129.03,43.31 IC4.5 131.65,43.25 132.22,42.67 | 91.44,62.74 91.57,62.61 92.96,62.61 R1-PINH1.2 | 91.44,62.74 90.55,63.63 90.55,64.39 D7.2 | 92.71,52.2 92.96,52.2 R2-PINH1.2 92.71,52.2 | 92.71,52.2 92.71,55.5 89.28,58.93 89.28,60.45 U3.2 89.28,60.58 89.28,60.97 90.28,61.98 90.68,61.98 91.44,62.74 | 77.85,25.27 77.72,25.4 Q2.3 | R8.2 72.26,16.26 73.99,16.26 75.87,18.14 75.87,23.39 76.34,23.85 76.34,23.95 Q2.3 | 80.26,25.02 80.26,24.38 R_CL1.2 | 80.26,25.02 80.01,25.27 77.85,25.27 | 77.85,25.27 Q2.3 | v92.08,52.2 92.71,52.2 | 80.26,25.02 v80.26,25.78 | 44.7,105.66 46.74,103.63 47.5,103.63 IC1.2 47.62,103.63 48.26,103.63 50.04,105.41 51.18,105.41 55.24,109.47 60.71,109.47 R_CHANGE.2 | 44.7,105.66 44.7,109.22 44.96,109.47 R_BOOT.2 | R_RESET.2 20.7,109.47 v19.94,109.47 19.81,109.47 10.79,100.46 9.53,100.46 R9.2 9.4,100.46 8.76,100.46 8.51,100.2 8.51,99.69 8,99.19 7.62,99.19 C9.1 7.49,99.31 7.37,99.19 7.49,99.06 7.49,90.93 | J4.P4 5.71,89.28 6.68,89.28 7.49,90.09 7.49,90.93 | v44.32,105.28 44.7,105.66 | 18.16,45.47 10.41,45.47 9.02,46.86 9.02,47.75 U2.2 | 18.16,45.47 19.05,45.47 R1.2 | 43.05,35.69 44.45,35.69 R6.2 44.58,35.69 45.59,35.69 R7.2 | 43.05,35.69 41.53,35.69 R5.2 41.4,35.69 38.35,35.69 29.93,27.26 | 29.93,27.26 14.22,11.56 10.92,11.56 TP16.TP | v30.1,51.05 30.99,51.05 R10.2 31.11,51.05 31.11,53.98 30.99,54.1 30.99,55.75 31.24,56.01 31.88,56.01 U1.3 32,56.01 32.64,56.01 32.89,55.75 32.89,54.99 34.45,53.43 37.17,53.43 38.09,54.34 38.09,56.38 38.99,57.28 39.62,57.28 U1.7 39.75,57.28 40.01,57.28 40.01,58.55 39.75,58.55 U1.8 39.62,58.55 v38.73,58.55
  Top 0.305: 20.32,41.27 20.41,41.36 v20.45,41.4 | v7.24,90.93 7.49,90.93 | v42.8,38.61 43.05,38.35 43.05,35.69 | C3.+ 131.12,42.65 129.87,41.4 129.87,39.09 129.26,38.48 123.95,38.48 121.92,40.51 C1_BAT2.1 119.87,41.8 v119.21,42.46 | 18.16,45.47 18.16,44.8 18.09,44.73 18.09,43.5 20.32,41.27 | 29.93,27.26 26.48,27.26 19.48,34.27 19.48,40.44 20.32,41.27
  Bottom 0.305: 92.08,44.32 v92.08,52.2 | 80.26,32.51 92.08,44.32 | v80.26,25.78 80.26,32.51 | 92.08,44.32 93.99,42.41 119.16,42.41 v119.21,42.46 | v44.32,105.28 44.07,105.54 30.99,105.54 28.83,107.7 21.72,107.7 v19.94,109.47 | v20.45,41.4 v30.1,51.05 | v7.24,90.93 7.24,90.68 38.73,59.18 v38.73,58.55 | 80.26,32.51 50.6,32.51 44.51,38.61 v42.8,38.61
32KHZ  (via drill 0.3)
  Top 0.15: R2-PINH1.1 93.09,50.93 93.96,51.8 93.96,55.19 90.55,58.6 v90.55,59.18 90.55,60.45 U3.1 | U2.9 17.91,47.75 17.91,47.12 18.67,46.35 19.28,46.35 19.75,45.88 19.75,45.02 19.44,44.7 18.57,44.7 18.45,44.58 18.45,43.72 18.57,43.6 29.24,43.6 38.6,52.96 40.88,52.96 v41.66,53.73
  Bottom 0.15: v90.55,59.18 90.04,59.69 87.88,59.69 81.93,53.73 v41.66,53.73
DN
  Top 0.15: 164.59,53.72 164.85,53.98 164.85,54.1 164.34,54.61 163.7,54.61 J2.A7 | 164.59,53.72 164.47,53.59 163.7,53.59 J2.B7 | 164.59,53.72 164.72,53.59 164.97,53.59 165.74,52.83 165.74,48.01 165.35,47.62 162.81,47.62 162.05,48.39 156.46,48.39 D1.4
DP
  Top 0.15: J2.A6 163.58,54.1 162.81,54.1 162.43,54.48 162.43,54.61 162.81,54.99 163.58,54.99 J2.B6 163.7,54.99 164.34,54.99 165.48,56.13 165.48,57.4 164.85,58.04 163.07,58.04 162.81,58.29 156.72,52.2 156.72,50.29 156.46,50.29 D1.6
EPD_3V3
  Top 0.15: 80.39,27.43 78.61,27.43 77.85,26.67 77.6,26.67 75.95,25.02 75.95,24.38 75.69,24.38 Q2.2 | 82.17,15.49 82.04,15.37 81.79,15.37 J1.16 | 82.17,15.49 82.3,15.37 J1.15 82.17,15.49 | 77.22,21.84 76.83,21.84 EPD_C5.2 77.22,21.84 | 77.22,21.84 77.34,21.84 77.72,21.46 77.72,18.94 77.47,18.68 | 80.39,27.43 81.15,27.43 81.15,23.88 80.01,22.73 78.11,22.73 77.22,21.84 | 80.39,27.43 L1.2 | 77.47,18.68 73.65,14.86 73.46,14.86 71.29,12.7 69.22,12.7 C7.1 69.22,12.57 69.22,12.52 63.21,6.52 TP17.TP | 82.17,15.49 80.84,16.82 80.84,16.85 79.01,18.68 77.47,18.68
EPD_3V3_C  (via drill 0.3)
  Top 0.15: v78.11,24.51 78.23,24.38 78.87,24.38 R_CL1.1 | v76.45,26.16 76.33,26.29 75.69,26.29 Q2.1 | v20.45,63.12 20.45,65.28 U2.18 | v29.21,12.83 29.59,12.45 29.59,11.56 29.84,11.56 TP13.TP | v66.8,15.75 66.64,15.58 30.46,15.58 28.64,13.76 v28.41,13.76
  Bottom 0.15: v76.45,26.16 76.83,25.78 | 76.83,25.78 v78.11,24.51 | v29.21,12.83 28.32,13.72 | 28.32,13.72 28.37,13.72 v28.41,13.76 | 28.32,13.72 17.17,24.87 17.17,38.76 20.88,42.47 20.88,53.09 20.45,53.52 v20.45,63.12 | v66.8,15.75 71.22,20.17 71.22,20.18 72.43,21.38 72.44,21.38 76.83,25.78
EPD_BUSY  (via drill 0.3)
  Top 0.15: v84.71,13.72 85.22,14.22 85.22,14.48 85.09,14.61 85.22,14.73 85.22,15.24 J1.9 | 18.8,7.62 20.07,7.62 22.46,5.23 34.57,5.23 v36.96,7.62 | v10.29,64.14 10.29,65.28 U2.26 | v12.32,57.28 12.32,61.85 v12.33,61.86 | 18.8,7.62 v18.8,9.02 | 18.8,7.62 TP9.TP
  Bottom 0.15: v12.32,57.28 12.32,16.13 18.8,9.65 v18.8,9.02 | v36.96,7.62 40.62,11.28 40.63,11.28 41.6,12.25 78.93,12.25 81.65,14.96 83.46,14.96 v84.71,13.72 | v12.33,61.86 10.29,63.9 v10.29,64.14
EPD_CS  (via drill 0.3)
  Top 0.15: v10.41,99.19 9.53,99.19 R9.1 | v13.21,98.55 13.59,98.17 13.59,97.66 13.72,97.66 D6.2 | J1.12 83.69,15.24 83.69,14.59 81.3,12.2 69.77,12.2 63.81,6.23 45.1,6.23 43.81,4.95 15.75,4.95 13.21,7.49 12.7,7.49 TP10.TP 12.57,7.62 12.57,9.35 17.02,13.8 v17.18,13.8 | v20.45,46.23 20.45,47.75 U2.11
  Bottom 0.15: v13.21,98.55 12.57,99.19 v10.41,99.19 10.41,96.65 6.48,92.71 6.48,67.1 20.18,53.4 20.18,46.75 20.57,46.35 v20.45,46.23 16.91,42.7 16.91,42.68 16.89,42.66 16.89,14.1 v17.18,13.8
EPD_DC  (via drill 0.3)
  Top 0.15: v42.55,9.53 42.16,9.91 42.16,10.54 41.53,10.54 TP11.TP | J1.11 84.2,15.24 84.2,13.52 82.37,11.68 76.83,11.68 75.69,10.54 68.96,10.54 64.38,5.96 46.6,5.96 v46.35,5.71 | v12.83,46.35 12.83,47.75 U2.5
  Bottom 0.15: v46.35,5.71 42.58,9.49 | 42.58,9.49 v42.55,9.53 | v12.83,46.35 16.13,43.05 16.13,12.71 21.73,7.11 41.45,7.11 42.58,8.24 42.58,9.49
EPD_RST  (via drill 0.3)
  Top 0.15: v84.71,14.35 84.71,15.24 J1.10 | v37.72,11.56 36.32,11.56 TP12.TP 36.2,11.43 36.07,11.56 36.2,11.68 v36.2,14.1 | v16.64,64.14 16.64,65.28 U2.21 | v17.65,63.12 17.91,63.37 18.41,63.37 v30.1,51.69
  Bottom 0.15: v84.71,14.35 83.82,15.24 81.53,15.24 78.82,12.53 41.48,12.53 40.51,11.56 v37.72,11.56 | v17.65,63.12 v16.64,64.14 | v36.2,14.1 36.2,14.73 36.7,15.24 37.21,15.24 41.12,19.15 41.12,40.66 v30.1,51.69
FLASH_CS  (via drill 0.3)
  Top 0.15: v42.29,34.42 41.53,34.42 R5.1 | v45.97,40.13 45.97,39.37 D9.2 | v33.66,58.55 32,58.55 U1.1 | v21.72,46.74 21.72,47.75 U2.12
  Bottom 0.15: v42.29,34.42 42.29,37.97 41.66,38.61 41.66,38.85 42.42,39.61 42.42,39.63 42.93,40.13 | v45.97,40.13 42.93,40.13 | v21.72,46.74 33.53,58.55 v33.66,58.55 33.92,58.55 42.93,49.54 42.93,40.13
GDR  (via drill 0.3)
  Top 0.15: J1.2 88.65,15.37 88.65,16.45 88.36,16.73 v85.37,19.71 | Q3.1 67.56,16.64 67.56,17.4 67.82,17.65 68.31,17.65 71.11,20.45 72.14,20.45 72.52,20.07 72.52,19.18 72.64,19.05 R4.2 72.77,19.18 73.67,19.18 v75.31,20.82
  Bottom 0.15: v85.37,19.71 85.14,19.71 84.15,20.71 75.42,20.71 v75.31,20.82
GND  (via drill 0.35)
  Top 0.15: U2.29_6 U2.29_5 | U4.6 139.82,53.11 U4.9 | U4.9 139.24,53.68 139.24,53.84 138.97,54.11 U4.1 | U4.9 139.24,53.03 139.24,52.88 138.97,52.61 U4.4 | D9.1 D10.1 | R2-USB.2 156.1,46.47 155.95,46.47 155.79,46.31 155.79,46.27 155.26,45.74 R2-USB1.1 | R2.1 66.28,12.78 SJ1.1
  other vias: 79,18 82,23 86,35 88,19 78.34,19.2 83.78,16.93 86.24,13.7 156.61,7.67 158.8,7.59 77.79,17.79 104.22,19.24 104.5,31.75 107.81,26.51 59.66,46.6 47.61,21.44 37.43,20.64 21.69,30.5 40.77,46.72 14.22,32.41 45.07,27.32 40.4,13.65 21.16,69 17.19,69.93 16.15,70.68 160.69,54.78 159.85,57.61 167.9,62.93 82.01,19.35 48.48,37.53 47.72,32.59 44.06,31.06 38.66,32.87 38.97,37.58 41.14,43.36 43.71,41.76 82.07,14.48 50.99,106.52 53.47,105.71 133.24,51.24 136.03,52.33 34.03,50.75 36.18,48.11 13.65,73.94 20.04,81.39 18.74,77.91 8.95,50.79 11.58,52.3 152.67,49.38 160.3,52.17 160.4,49.26 157.73,47.54 74.59,19 71.64,21.9 67.15,21.3 32.37,52.92 74.8,11.68 71.54,13.85 74.87,14.97 62.28,13.59 7.4,102.99 14.29,102.91 76.4,18.47 35.16,53.96 130.95,48.48 80.31,19.51 74.49,12.98 72.81,20.66 87.21,56.12 90.46,55.97 93.37,54.72 63.11,59.87 40.82,54.14 27.62,58.02 13.96,64.16 17.63,64.13 19.8,63.92 13.6,49.24 15.7,49.24 18.09,49.36 18.09,50.75 17.71,46.3 25.25,48.33 8.45,87.47 7.45,88.65 77.02,30.58 79.49,28.82 78.69,26.31 81.84,26.31 77.73,23.29 81.08,23.08 83.68,31.4 83.05,13.1 164.75,52.61 164.69,56.14 91.81,63.74
  pour Top: 6.06,46.96 6.04,46.94 6.02,46.92 0.08,46.92 0.08,0.08 73.92,0.08 73.92,10.02 73.94,10.04 73.96,10.06 73.98,10.08 92.02,10.08 92.04,10.06 92.06,10.04 92.08,10.02 92.08,0.08 169.92,0.08 169.92,66.92 91.98,66.92 91.96,66.94 91.94,66.96 91.92,66.98 91.92,110.92 68.08,110.92 68.08,109.98 68.06,109.96 68.04,109.94 68.02,109.92 19.98,109.92 19.96,109.94 19.94,109.96 19.92,109.98 19.92,110.92 0.08,110.92 0.08,66.08 6.02,66.08 6.04,66.06 6.06,66.04 6.08,66.02 6.08,46.98
  pour Bottom: 6.06,46.96 6.04,46.94 6.02,46.92 0.08,46.92 0.08,0.08 73.92,0.08 73.92,10.02 73.94,10.04 73.96,10.06 73.98,10.08 92.02,10.08 92.04,10.06 92.06,10.04 92.08,10.02 92.08,0.08 169.92,0.08 169.92,66.92 91.98,66.92 91.96,66.94 91.94,66.96 91.92,66.98 91.92,110.92 68.08,110.92 68.08,109.98 68.06,109.96 68.04,109.94 68.02,109.92 19.98,109.92 19.96,109.94 19.94,109.96 19.92,109.98 19.92,110.92 0.08,110.92 0.08,66.08 6.02,66.08 6.04,66.06 6.06,66.04 6.08,66.02 6.08,46.98
GPIO8
  Top 0.15: R1.1 19.18,44.2 19.81,44.2 20.07,44.45 20.07,45.97 19.18,46.86 19.18,47.75 U2.10
I2C_PW
  Top 0.15: 156.97,10.79 157.1,10.92 SENSOR2.2 | 156.97,10.79 156.34,10.16 156.34,9.4 SENSOR2.8 | 156.97,10.79 157.23,10.79 157.86,10.16 157.86,9.4 SENSOR2.6 157.86,9.27 157.86,6.22 | R2-PINH.2 159,6.22 157.99,6.22 R1_PINH.2 157.86,6.22 | 157.86,6.22 157.73,6.22 157.73,6.1 156.97,5.33 156.97,4.95 156.72,4.95 C2.1 156.59,4.95 155.57,4.95 C1.1 155.45,4.95 125.87,4.95 71.5,59.32 27.03,59.32 21.72,64.63 21.72,65.28 U2.17
INT_RTC  (via drill 0.3)
  Top 0.127: 39.74,53.47 39.73,53.48 38.74,53.48 33.38,48.12 29.71,48.12 29.03,48.8 17.37,48.8 16.64,48.06
  Top 0.15: R1-PINH1.1 93.09,61.34 93.73,61.34 93.98,61.59 93.98,62.87 91.44,65.41 88.01,65.41 87.5,64.9 87.5,62.36 88.01,61.85 88.01,60.58 U3.3 88.01,60.45 v88.01,59.18 | v16.64,45.97 16.64,47.75 U2.8 16.64,47.88 16.64,48.06 | TP15.TP 17.14,11.43 17.02,11.56 17.02,12.45 v16.64,12.82 | 39.74,53.47 v40.01,53.47
  Bottom 0.15: v16.64,45.97 16.64,42.79 16.61,42.77 16.61,12.85 v16.64,12.82 | v40.01,53.47 40.17,53.3 82.13,53.3 v88.01,59.18
IO/BOOT  (via drill 0.3)
  Top 0.15: C6.1 52.2,108.2 51.94,108.2 51.94,108.71 51.15,109.5 50.96,109.5 BOOT_BUTTON.3 | 46.1,108.46 46.1,108.2 45.72,108.2 R_BOOT.1 | v44.2,106.3 24.26,86.36 24.26,65.41 U2.15 | v45.34,107.44 45.72,107.82 R_BOOT.1 | 50.56,109.6 50.77,109.55 | BOOT_BUTTON.3 50.77,109.55 | BOOT_BUTTON.4 47.27,109.55 47.31,109.6 | 51.1,109.55 50.77,109.55 | 50.67,109.6 50,109.6 50.67,109.6 BOOT_BUTTON.3 | BOOT_BUTTON.4 46.49,108.73 46.48,108.73 45.94,108.18 R_BOOT.1 | BOOT_BUTTON.4 BOOT_BUTTON.3
  Bottom 0.15: v45.34,107.44 v44.2,106.3
IO/CHANGE  (via drill 0.3)
  Top 0.15: 66.93,108.2 67.18,108.2 C10.1 67.08,108.18 66.53,108.73 66.52,108.73 CHANGE_BUTTON.3 | v23.75,75.82 14.1,66.17 14.1,65.41 U2.23 | v59.31,108.2 60.71,108.2 R_CHANGE.1 62.07,109.5 CHANGE_BUTTON.4 | 65.53,109.6 65.75,109.56 CHANGE_BUTTON.3 | CHANGE_BUTTON.4 62.25,109.56 62.29,109.6 | CHANGE_BUTTON.3 CHANGE_BUTTON.4
  Bottom 0.15: v59.31,108.2 52.98,101.88 52.97,101.88 26.91,75.82 v23.75,75.82
MISO  (via drill 0.3)
  Top 0.127: v74.3,21.08 75.06,21.84 75.06,21.97 74.93,22.1 | 70.87,16.26 R8.1 70.87,16.13 70.87,14.73 v70.61,14.48 | 34.04,7.62 35.69,7.62 40.07,12 | v6.99,92.58 5.84,92.58 J4.P7 | 9.02,65.41 U2.27 9.02,65.28 9.02,64.39 9.77,63.64 18.52,63.64 24.89,57.28 31.88,57.28 U1.2 32,57.28 v33.4,57.28 | v8.26,91.31 8.91,90.66 | v65.41,14.22 42.29,14.22
  Top 0.15: v70.87,17.02 70.87,16.26 | 74.93,22.1 D12.2 | 34.04,7.62 TP6.TP | 9.02,65.41 9.02,66.93 6.99,68.96 6.99,84.71 8.91,86.63 8.91,90.66 | 42.29,14.22 40.07,12 | v36.83,14.72 36.83,14.61
  Top 0.305: 40.07,12 40.07,12.8 38.26,14.61 36.83,14.61
  Bottom 0.127: 71.5,20.07 71.5,17.65 | 65.66,13.97 70.1,13.97 v70.61,14.48 | v8.26,91.31 v6.99,92.58 | v74.3,21.08 73.02,21.08 72.99,21.11 72.54,21.11 | v36.83,14.72 36.84,14.73 37.08,14.73 41.39,19.04 41.39,38.97 42.14,39.72 | 34.8,57.28 42.14,49.93
  Bottom 0.15: 71.5,17.65 v70.87,17.02 | 65.66,13.97 v65.41,14.22 | v33.4,57.28 34.8,57.28 | 42.14,49.93 42.14,39.72 | 72.54,21.11 71.5,20.07
MOSI  (via drill 0.3)
  Top 0.127: 82.68,14.35 82.68,15.24 J1.14 | v30.35,7.62 28.96,7.62 | 44.07,51.94 41.27,54.74 39.75,54.74 U1.5 39.62,54.74 | U2.7 15.37,47.88 | 5.84,88.14 J4.P3 | 41.78,39.12 41.27,39.12 41.27,39.24 D11.2 | 38.7,54.57 v38.86,54.74 | 33.27,48.39 38.7,53.81 | 74.25,13.82 v73.64,14.44 | 16.66,49.71 16.75,49.81 28.91,49.81 30.33,48.39
  Top 0.15: R7.1 45.72,34.42 v46.35,35.05 | 28.96,7.62 TP7.TP | 44.07,43.69 41.27,40.89 41.27,39.37 D11.2 | v38.86,54.74 39.62,54.74 | 5.84,88.14 7.11,88.14 7.49,87.76 7.49,86.61 v7.24,86.36 | 41.78,39.12 v42.16,38.73 | 82.68,14.35 82.15,13.82 74.25,13.82 | 38.7,53.81 38.7,54.57 | 30.33,48.39 33.27,48.39 | 15.37,47.88 15.37,48.08 16.74,49.46 16.66,49.46 16.66,49.71 | v73.64,14.44
  Top 0.305: 44.07,51.94 44.07,43.69
  Bottom 0.127: 44.83,33.15 45.09,33.15 | 44.45,33.53 44.45,33.78 45.72,35.05 | v46.35,35.05 45.72,35.05 | 50.42,27.69 50.42,27.81 64.97,13.27 73.23,13.27 | 38.23,56.13 38.23,55.37 v38.86,54.74 | 45.72,35.05 42.16,38.61 v42.16,38.73 | 73.63,13.66 73.63,14.43 v73.64,14.44
  Bottom 0.15: 45.09,33.15 50.42,27.81 | 44.45,33.53 44.83,33.15 | v7.24,86.36 8,86.36 38.23,56.13 | 73.23,13.27 73.63,13.66
  Bottom 0.305: 50.42,27.69 50.42,25.96 32.08,7.62 v30.35,7.62
N$1  (via drill 0.3)
  Top 0.15: v162.56,55.63 162.56,55.75 162.81,56.01 163.58,56.01 J2.B5 | R2-USB.1 155.07,46.86 155.07,47.46 v155.21,47.61
  Bottom 0.15: v162.56,55.63 155.21,48.28 v155.21,47.61
N$2  (via drill 0.3)
  Top 0.15: 124.33,41.4 126.11,41.4 IC4.3 126.24,41.4 v128.02,41.4 | 124.33,41.4 123.57,41.4 D2.1 | 124.33,41.4 124.33,42.29 125.35,43.31 126.11,43.31 IC4.1 | Q1.2 137.67,47.5 137.67,42.67 136.4,41.4 135.76,41.4 C1_BAT1.1 v134.79,41.44
  Bottom 0.15: v128.02,41.4 134.75,41.4 v134.79,41.44
N$3
  Top 0.127: 122.3,51.44 122.3,50.8 122.56,50.55 124.08,50.55 124.97,51.44 125.86,51.44 CHG_LED.C
  Top 0.15: 122.3,51.44 R1_BAT.1
N$4
  Top 0.127: 127.13,49.91 128.78,49.91 MCP73831.5
  Top 0.15: 127.13,49.91 127.13,50.16 R2_BAT.2
N$5
  Top 0.127: 92.71,30.86 92.84,30.73 93.73,30.73 C4.1 | 92.2,30.86 D4.1 | 92.58,30.86 92.58,27.43
  Top 0.15: 92.2,30.86 92.58,30.86 | 92.58,30.86 92.71,30.86 | 92.58,27.43 92.2,27.43 D3.2 | 92.58,30.86 D4.1
N$6  (via drill 0.3)
  Top 0.15: v159,47.88 156.97,45.85 156.46,45.85 R2-USB1.2 | J2.A5 163.58,53.09 162.69,53.09 v162.6,53
  Bottom 0.15: v159,47.88 159,49.3 162.27,52.56 162.27,52.67 v162.6,53
N$7
  Top 0.127: 87.63,15.24 87.63,14.48 87.76,14.35 89.53,14.35 91.82,16.64 91.82,25.78 | EPD_C1.2 72.52,25.91
  Top 0.15: 91.82,25.78 89.79,27.81 89.79,31.09 89.36,31.52 84.61,31.52 84.6,31.51 82.8,29.72 77.23,29.72 77.2,29.74 76.1,29.74 73.15,26.8 72.39,26.04 72.39,25.91 72.52,25.91 | 87.63,15.24 J1.4
N$8  (via drill 0.3)
  Top 0.127: v124.46,51.56 123.7,51.56 R1_BAT.2 | MCP73831.1 131.42,49.91 132.36,49.91 v132.38,49.9
  Bottom 0.127: 128.78,51.56 130.43,49.91 132.36,49.91 v132.38,49.9
  Bottom 0.15: 128.78,51.56 v124.46,51.56
N$9
  Top 0.127: 85.85,17.53 87.25,16.13 87.25,15.37 J1.5 | 73.91,26.29 73.91,25.91 74.17,25.91 EPD_C2.2 | 77.09,29.46 77.11,29.46 77.12,29.45 83.07,29.45 83.44,29.08 83.44,26.92 81.56,25.04 81.56,22.1 | 81.48,22.02 81.48,20.23
  Top 0.15: 73.91,26.29 77.09,29.46 | 85.85,17.53 82.09,17.53 80.76,18.85 80.76,19.52 81.48,20.23 | 81.56,22.1 81.48,22.02
N$10
  Top 0.127: 50.67,103.63 50.67,104.52 | 50.42,104.52 IC1.5
  Top 0.15: 50.67,104.52 50.42,104.52 | 50.67,103.63 51.05,103.25 51.69,103.25 C_DELAY.1
N$14
  Top 0.127: 88.77,64.14 88.52,64.39 D7.1 | 88.77,62.87 R_CAPACITOR.1
  Top 0.15: 88.77,64.14 88.77,62.87
N$19  (via drill 0.3)
  Top 0.127: v77.09,15.37 77.6,15.37 J1.24 | 89.79,21.59 90.04,21.84 90.68,21.84
  Top 0.15: 89.79,21.59 v89.79,15.24 | EPD_C12.2 90.68,21.84
  Bottom 0.127: 76.96,14.22 80.14,14.22 81.42,15.51 87.77,15.51 | v89.79,15.24 89.62,15.4 87.87,15.4
  Bottom 0.15: v77.09,15.37 76.58,14.86 76.58,14.61 76.96,14.22 | 87.87,15.4 87.77,15.51
N$21  (via drill 0.3)
  Top 0.127: 84.07,21.21 84.58,21.21 84.71,21.34 84.84,21.21 | 86.74,21.84 85.85,21.84 | 78.69,14.98 78.35,14.64 | 77.18,14.64 v77.09,14.73
  Top 0.15: 84.84,21.21 85.22,21.21 85.85,21.84 | EPD_C10.2 86.74,21.84 | J1.22 78.69,14.98 | 78.35,14.64 77.18,14.64 | 84.07,21.21 83.97,21.11 83.97,20.06 83.45,19.54 v83.45,19.18
  Bottom 0.127: v77.09,14.73 77.34,14.48 80.01,14.48 83.31,17.78 83.31,19.04 v83.45,19.18
N$23  (via drill 0.3)
  Top 0.127: 81.78,21.71 81.78,19.81 | 82.55,21.84 81.92,21.84 | J1.20 79.63,15.36 79.63,16.25
  Top 0.15: 81.92,21.84 81.78,21.71 | EPD_C8.2 82.55,21.84 | 79.63,16.25 v79.62,16.25 v79.62,16.26 | 81.78,19.81 81.19,19.22 v81.19,19.18
  Bottom 0.127: v79.62,16.26 | v81.19,19.18 81.14,19.13 81.14,16.75
  Bottom 0.15: v79.62,16.26 79.69,16.2 80.59,16.2 81.14,16.75
N$24  (via drill 0.3)
  Top 0.127: 79.63,21.59 79.88,21.84 80.52,21.84 | v79.9,17.17 79.99,17.08 79.99,16.49 | 79.63,19.49 80.34,18.78 v80.34,18.77
  Top 0.15: 79.63,21.59 79.63,19.49 | EPD_C7.2 80.52,21.84 | J1.19 80.14,15.35 80.14,16.34 79.99,16.49
  Bottom 0.127: 80.25,17.51 80.25,18.67 v80.34,18.76 v80.34,18.77
  Bottom 0.15: 80.25,17.51 v79.9,17.17
N$25  (via drill 0.3)
  Top 0.127: 80.64,15.62 80.9,15.88 80.9,16.17 80.41,16.66 v80.41,16.67 | v80.67,18.12 80.27,18.12 79.36,19.02 79.36,21.73 | EPD_C6.2 78.74,21.84
  Top 0.15: 80.64,15.62 80.64,15.37 J1.18 | 78.74,21.84 79.25,21.84 79.36,21.73
  Bottom 0.15: v80.67,18.12 80.67,16.93 v80.41,16.67
PREVGH  (via drill 0.3)
  Top 0.127: v78.99,16.26 79.25,16 79.25,15.37 J1.21 | 84.58,21.84 83.79,21.84 | v85.47,22.1 85.47,21.97 85.34,21.84 84.71,21.84 EPD_C9.2 | 83.09,34.64 v83.1,34.63
  Top 0.15: EPD_C9.2 84.58,21.84 | D5.1 83.09,34.64 | 83.79,21.84 83.69,21.75 83.69,20.18 82.87,19.35 v82.87,19.18
  Bottom 0.127: 83.1,24.47 v83.1,34.63 | 79.42,15.84 v78.99,16.26 | 82.72,19.18 81.56,18.01 81.56,16.8 80.6,15.84 80.58,15.84
  Bottom 0.15: v85.47,22.1 83.1,24.47 | v82.87,19.18 82.72,19.18 | 80.58,15.84 79.42,15.84
PREVGL  (via drill 0.3)
  Top 0.127: 78.23,15.37 78.23,16 v78.36,16.13 | 87.25,22.73 83.96,22.73 83.42,22.18 | 88.65,21.84 EPD_C11.2 | 88.27,30.86 88.65,30.86 D4.2 | 87.25,27.81 88.27,28.83 | 82.8,19.68 82.79,19.68 82.45,19.35 82.45,19.17 82.18,18.89
  Top 0.15: 88.65,21.84 88.14,21.84 87.25,22.73 87.25,27.81 | 78.23,15.37 J1.23 | 88.27,28.83 88.27,30.86 | 82.18,18.89 v82.18,18.04 | 83.42,22.18 83.29,22.06 83.29,20.17 82.81,19.68 82.8,19.68
  Bottom 0.127: 81.97,16.82 81.97,17.83
  Bottom 0.15: v78.36,16.13 78.99,15.49 80.64,15.49 81.97,16.82 | 81.97,17.83 v82.18,18.04
RESE  (via drill 0.3)
  Top 0.127: 71.37,19.3 71.37,19.18 70.23,19.18 | 71.5,19.05 R3.2 | 68.83,16.64 Q3.2 | 88.18,15.31 J1.3
  Top 0.15: 71.37,19.3 v72.01,19.94 | 71.5,19.05 71.37,19.18 R3.2 | 68.83,16.64 68.83,17.78 70.23,19.18 | 88.18,15.31 88.18,16.3 v88.19,16.3
  Bottom 0.127: v72.01,19.94 72.28,20.21 73,20.21 | 73.13,20.34 76.75,20.34 | 76.84,20.43 84.04,20.43 88.17,16.3 v88.19,16.3
  Bottom 0.15: 73,20.21 73.13,20.34 | 76.75,20.34 76.84,20.43
RESE'
  Top 0.127: 67.44,13.08 67.44,12.45 SJ1.2 | 71.5,17.78 70.74,17.78 69.6,16.64 69.6,16 67.94,14.35 67.69,14.35 R2.2
  Top 0.15: 67.44,13.08 67.56,13.21 67.56,14.22 R2.2 | 71.5,17.78 R3.1
RESET  (via drill 0.3)
  Top 0.127: 21.08,108.46 21.08,108.2 20.83,108.2 R_RESET.1 20.7,108.2 7.84,95.34 7.84,88.88 7.89,88.83 7.89,85.99 6.72,84.83 6.72,66.18 6.86,66.04 6.86,65.28 | 6.99,65.15 6.99,64.64 10.28,61.35 10.28,51.83
  Top 0.15: 6.86,65.28 6.99,65.15 | v28.7,108.2 28.68,108.18 C5.1 27.08,108.18 26.53,108.73 26.52,108.73 RESET_BUTTON.3 RESET_BUTTON.4 22.12,109.5 R_RESET.1 | IC1.1 46.53,104.55 v45.25,105.83 | 10.28,51.83 U2.3
  Bottom 0.127: v28.7,108.2 28.87,108.04 28.97,108.04 31.13,105.88 44.21,105.88 44.26,105.83 v45.25,105.83
RTC_RST
  Top 0.127: U3.4 86.74,60.45 86.74,59.31 86.49,59.05 72.14,59.05 70.58,60.61 | 26.13,60.61 22.99,63.75
  Top 0.15: 22.99,63.75 22.99,65.28 U2.16 | 70.58,60.61 26.13,60.61
RX  (via drill 0.3)
  Top 0.127: TP2.TP v80.9,101.6 | U2.24 12.83,65.41 12.83,66.2 22.31,75.68 22.72,75.68
  Top 0.15: v22.99,75.69 22.73,75.69 22.72,75.68
  Bottom 0.127: 23.62,75.31 26.8,75.31 53.09,101.6
  Bottom 0.15: v22.99,75.69 23.24,75.69 23.62,75.31 | v80.9,101.6 53.09,101.6
SCK  (via drill 0.3)
  Top 0.127: 21.97,12.57 21.97,9.53 | 23.75,7.62 TP8.TP | 44.32,34.42 R6.1 | 38.99,56.01 39.62,56.01 U1.6 39.75,56.01 41.47,56.01 | 44.32,39.12 D10.2 | J4.P5 5.87,90.3 6.91,90.3 v6.95,90.26 | 38.44,55.46 38.43,55.45 38.43,54.2 33.16,48.93 30.19,48.93 | 82.14,13.43 83.19,14.48 | 28.88,50.24 15.52,50.24
  Top 0.15: 83.19,14.48 83.19,15.24 J1.13 | 44.32,34.42 44.32,34.29 v44.96,33.66 45.09,33.53 45.97,33.53 46.86,34.42 46.86,35.81 45.97,36.7 44.13,36.7 43.44,37.38 43.44,38.74 43.81,39.12 44.32,39.12 | 44.32,34.42 44.45,34.54 R6.1 | 23.75,7.62 23.11,7.62 23.11,8.38 21.97,9.53 | 21.97,12.57 43.81,34.42 44.32,34.42 | v38.73,56.01 38.99,56.01 38.44,55.46 | D10.2 45,39.93 45,52.48 41.47,56.01 | 82.14,13.43 73.31,13.43 v73.05,13.69 | 30.19,48.93 28.88,50.24 | U2.6 14.52,48.28 14.52,49.23 15.52,50.24
  Bottom 0.127: v44.96,33.66 63.88,14.73 | v38.73,56.01 6.99,87.76 | 6.99,90.22 v6.95,90.26 | 67.56,14.73 67.73,14.89 71.85,14.89 v73.05,13.69
  Bottom 0.15: 63.88,14.73 67.56,14.73 | 6.99,87.76 6.99,90.22
SCL  (via drill 0.3)
  Top 0.127: 159.26,10.54 v159.51,10.54 165.48,16.51 165.48,19.3 163.58,19.3 150.48,32.4 150.48,44.46 141.6,53.34 | 158.75,11.05 158.75,12.19 SENSOR2.4 | R2-PINH.1 159.13,4.95 159.71,5.54 | 141.6,53.34 141.35,53.59 | J3.4 164.47,20.83 | v89.92,52.45 90.55,51.82 | 17.91,65.28 U2.20 | 90.55,51.31 U3.16 | v141.48,53.21 141.6,53.34 | 77.72,52.7 71.39,59.04 | 164.65,20.83 165.48,20 | v159.51,9.27 159.71,9.07
  Top 0.15: 159.26,10.54 158.75,11.05 | 141.35,53.59 140.59,53.59 U4.7 | v77.72,52.45 77.72,52.7 | 90.55,51.82 90.55,51.31 | 17.91,65.28 17.91,64.64 23.51,59.04 71.39,59.04 | 164.47,20.83 164.65,20.83 | 165.48,20 165.48,19.3 | 159.71,9.07 159.72,9.06 159.72,5.55 159.71,5.54
  Bottom 0.127: 89.75,52.29 v89.92,52.45 90.69,53.22 128.57,53.22 128.59,53.21 | 77.89,52.29 v77.72,52.45
  Bottom 0.15: v159.51,10.54 v159.51,9.27 | 89.75,52.29 77.89,52.29 | v141.48,53.21 128.59,53.21
SDA  (via drill 0.3)
  Top 0.15: 159.51,9.91 160.02,9.4 160.02,4.57 159.51,4.06 158.5,4.06 157.99,4.57 157.99,4.83 R1_PINH.1 | SENSOR2.3 157.86,12.19 157.86,11.43 158.12,11.18 158.23,11.18 159.14,10.26 159.15,10.26 159.51,9.91 | 162.56,20.7 163.45,19.81 164.34,19.81 J3.3 | 162.56,20.7 150.75,32.51 150.75,44.58 146.69,48.64 146.69,48.77 141.35,54.1 140.59,54.1 U4.8 140.46,54.23 140.46,54.36 v140.21,54.61 | 159.51,9.91 165.86,16.26 165.86,20.7 165.48,21.08 165.48,21.21 165.1,21.59 163.45,21.59 162.56,20.7 | U3.15 89.28,51.31 89.28,52.45 89.03,52.7 v89.03,52.72 | v26.16,59.56 23.38,59.56 19.18,63.77 U2.19
  Bottom 0.15: v26.16,59.56 26.18,59.54 33.32,59.54 39.91,52.95 88.78,52.95 89.03,52.7 | 89.03,52.7 89.28,52.96 90.04,52.96 90.57,53.49 139.09,53.49 v140.21,54.61 | 89.03,52.7 v89.03,52.72
SRC
  Top 0.15: 80.39,32 93.73,32 C4.2 | 78.99,32 80.39,32 | 78.99,32 78.74,32 78.61,32.13 77.47,32.13 68.2,22.86 68.2,18.8 Q3.3 | 80.39,32 L1.1 | 78.99,32 78.99,34.67 78.61,34.67 D5.2
SS_SD  (via drill 0.3)
  Top 0.15: D8.2 32.51,51.05 32.51,50.8 32,50.8 31.37,50.16 31.37,49.66 31.11,49.66 R10.1 29.8,49.71 28.31,51.2 16.09,51.2 15.15,50.26 12.22,50.26 | U2.4 11.56,47.88 11.56,48.64 12.7,49.78 12.22,50.26 | v5.08,87 6.1,87 J4.P2 | 12.22,50.26 10.56,51.93 10.56,51.94 10.54,51.96 v10.54,61.72
  Bottom 0.15: v5.08,87 5.08,68.07 10.54,62.61 v10.54,61.72
TX  (via drill 0.3)
  Top 0.15: v53.59,103.12 85.34,103.12 86.87,101.6 TP1.TP | U2.25 11.56,65.41 11.56,67.23 20.78,76.45 v23.75,76.45
  Bottom 0.15: v53.59,103.12 26.92,76.45 v23.75,76.45
USB_D+  (via drill 0.3)
  Top 0.15: v151.89,50.29 153.8,50.29 D1.1 | v41.15,51.94 37.97,51.94 33.66,47.62 v33.66,47.37 | v30.35,47.62 30.12,47.86 29.6,47.86 U2.14
  Bottom 0.15: v33.66,47.37 30.61,47.37 v30.35,47.62 | v41.15,51.94 41.79,51.94 41.8,51.95 90.06,51.95 91.04,52.94 128.49,52.94 131.1,50.33 132.55,50.33 132.59,50.29 v151.89,50.29
USB_D-  (via drill 0.3)
  Top 0.15: D1.3 153.8,48.39 152.88,48.39 152.16,49.11 152.06,49.11 v151.89,49.28 | U2.13 22.99,47.75 22.99,46.86 23.24,46.61 25.02,46.61 25.49,47.08 v26.84,47.08 | v41.66,51.44 38.35,51.44 v33.66,46.74
  Bottom 0.15: v151.89,49.28 95.63,49.28 92.28,52.62 91.12,52.62 90.16,51.67 41.89,51.67 v41.66,51.44 | v26.84,47.08 33.31,47.08 v33.66,46.74
VBAT
  Top 0.305: C2_BAT.1 129.03,46.86 129.67,46.86 129.79,46.99 129.92,46.86 | MCP73831.3 131.32,51.82 131.07,51.82 130.52,51.27 130.52,51.15 130.11,50.73 130.11,47.2 129.78,46.86 129.92,46.86 | 137.79,52.96 137.92,53.09 138.56,53.09 U4.3 138.56,53.21 138.56,53.58 U4.2 | 137.79,52.96 136.65,51.82 136.65,49.78 Q1.3 136.65,49.66 136.65,47.12 136.14,46.61 135,46.61 134.75,46.86 129.92,46.86 | 137.79,52.96 137.67,53.09 137.67,54.36 144.91,61.59 TP3.TP
VBUS  (via drill 0.3)
  Top 0.305: C5_USB.1 157.99,50.55 157.99,50.04 157.23,49.28 156.46,49.28 D1.5 156.34,49.28 155.45,49.28 154.94,48.77 154.94,48.12 154.31,47.5 | 154.31,47.5 154.31,45.09 154.69,44.7 156.34,44.7 156.59,44.45 156.59,43.43 PFMF.050.1.2 | CHG_LED.A 127.51,51.44 127.64,51.44 127.89,51.18 128.27,51.18 128.4,51.31 128.4,51.82 128.78,51.82 MCP73831.4 128.91,51.82 129.79,51.82 | 134.49,52.7 134.49,52.58 135.76,51.31 v135.76,48.77 135.76,47.62 Q1.1 | 134.49,52.7 134.62,52.83 C1_BAT.1 134.49,52.7 | 129.79,51.82 129.92,51.82 130.81,52.7 134.49,52.7 | TP14.TP 23.62,11.56 26.94,11.56 30.61,15.23 66.78,15.23 66.8,15.24 v67.44,15.24 | v147.19,48.77 150.88,48.77 C4_USB.1 152.02,48.75 153.27,47.5 154.31,47.5 | v117.73,41.41 117.73,44.62 R1_PWRUSB.2 119.16,45.92 121.09,45.92 123.44,43.56 D2.2 123.57,43.56 124.21,43.56 124.33,43.69 124.33,44.96 128.27,48.9 129.03,48.9 129.68,49.54 129.68,50.91 129.79,51.03 129.79,51.82
  Bottom 0.305: v135.76,48.77 v147.19,48.77 | v117.73,41.41 92.12,15.8 87.98,15.8 83.74,20.04 76.95,20.04 72.15,15.24 v67.44,15.24
VRTC
  Top 0.305: 88.14,49.78 88.14,49.91 88.01,50.04 88.01,51.18 U3.14 88.01,51.31 88.01,52.83 88.65,53.47 88.65,61.72 88.9,61.98 89.66,61.98 90.04,62.36 90.04,62.74 R_CAPACITOR.2 | 88.14,49.78 88.14,48.64 C8.1 | 88.14,49.78 93.09,49.78 94.23,50.93 95.25,50.93 C10_SUPERCAP.2
VUSB  (via drill 0.3)
  Top 0.305: J2.A4 163.58,51.82 163.58,51.94 J2.B9 163.58,52.07 162.81,52.07 v161.93,52.96 161.93,56.14 162.68,56.9 163.07,56.52 163.58,56.52 J2.B4 163.58,56.64 163.58,56.77 J2.A9 | v153.16,45.09 152.78,44.7 152.15,44.7 152.02,44.58 152.02,43.43 PFMF.050.1.1
  Bottom 0.305: v153.16,45.09 154.05,45.09 v161.93,52.96